# Altium PCB PCB2.PcbDoc
Units mil, origin at the board's own origin, x right, y up, seen from the top; angles counter-clockwise.
Board outline 6000 x 4000 mil, 2 copper layers (Top Layer, Bottom Layer); 4 components, 85 nets, 140 pads, 0 vias.
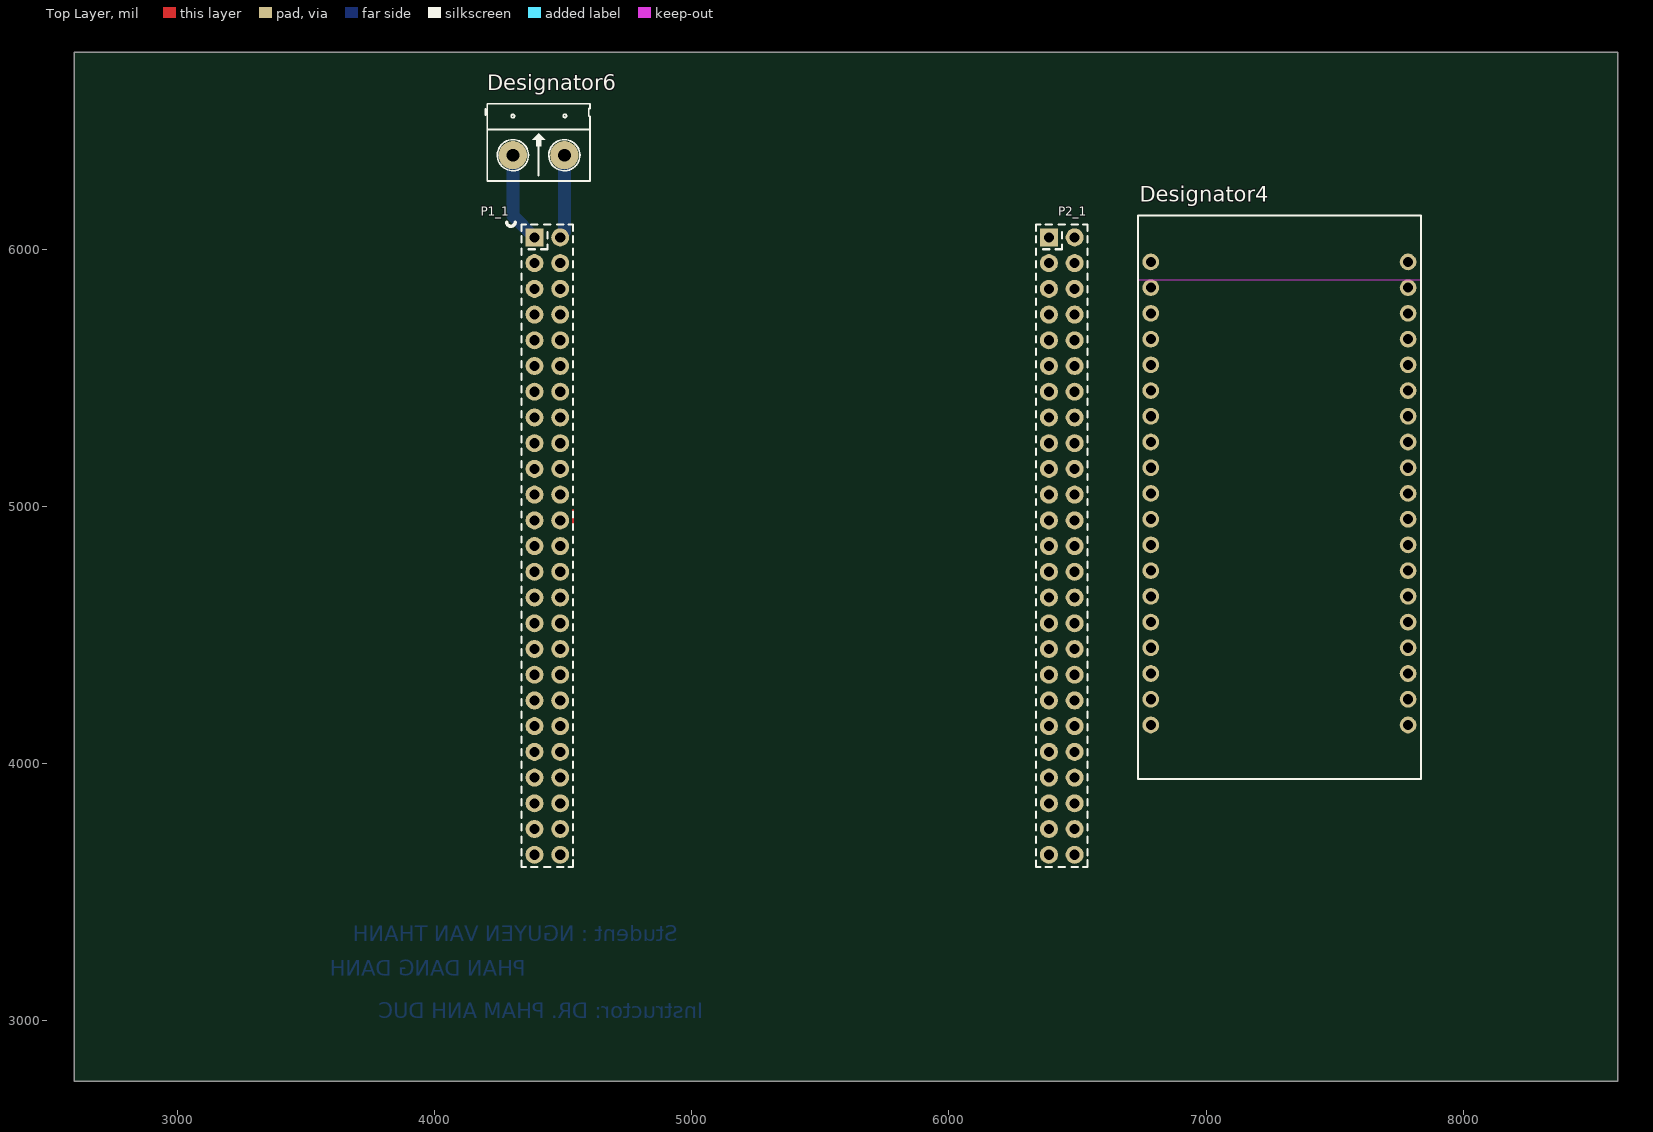
[diagram p0: Top Layer view]
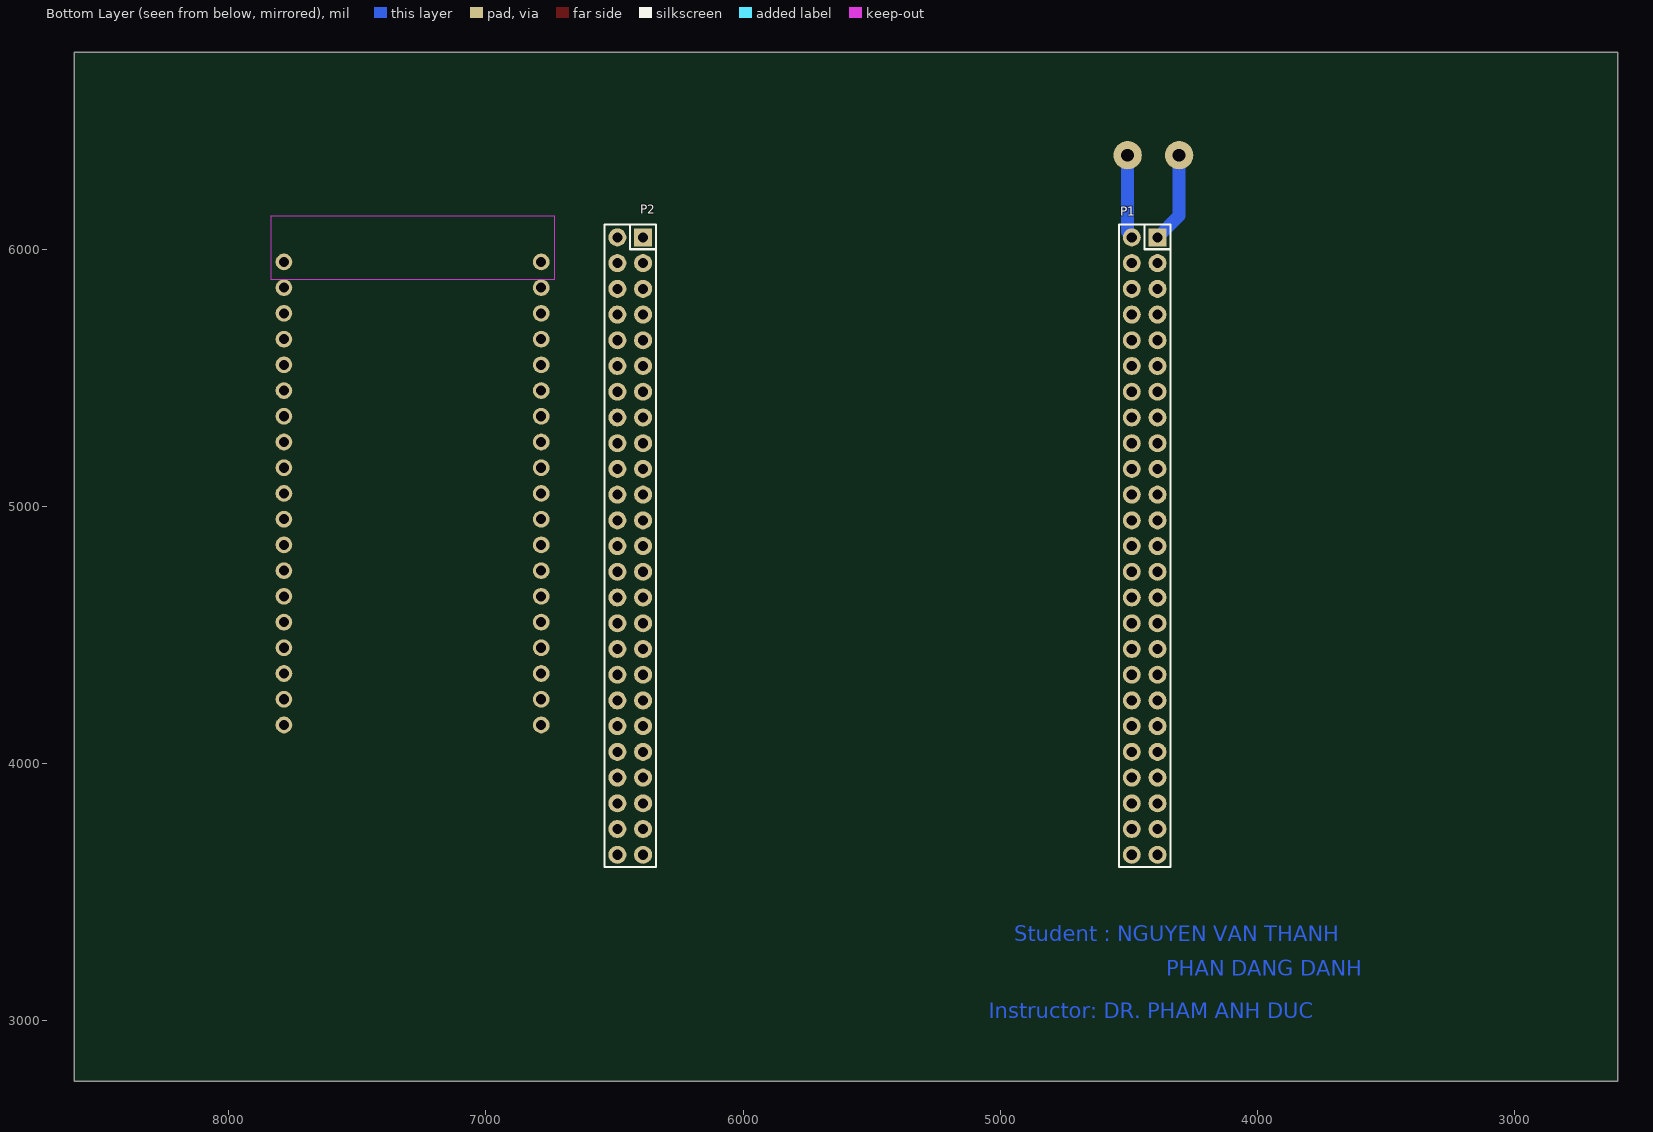
[diagram p1: Bottom Layer view, seen from below]

## Layer stack, top to bottom
Top Solder: solder mask 0.4, Solder Resist, Dk 3.5
Top Layer: signal copper 1.4
Dielectric 1: dielectric 12.6, FR-4, Dk 4.8
Bottom Layer: signal copper 1.4
Bottom Solder: solder mask 0.4, Solder Resist, Dk 3.5

## Board outline
2600,2765 8600,2765 8600,6765 2600,6765

## Design rules (kind name [scope] priority, off if disabled: settings)
Clearance [All] p1: gap=10 ignorepadtopadclearanceinfootprint=FALSE except(0: Arc-Hole Track-Hole SMDPad-Hole THPad-Hole Via-Hole Fill-Hole Poly-Hole Region-Hole Text-Hole)
PolygonConnect [All] p1: connectstyle=Relief reliefconductorwidth=10 reliefentries=4 polygonreliefangle="90 Angle" airgapwidth=10
RoomDefinition Sheet1 [InComponentClass('Sheet1')] p1: confinementstyle=ConfineIn formatcopy=TRUE lockcomponents=FALSE outline 1600,1765 3600,1765 3600,2765 1600,2765
RoutingVias [All] p1: holewidth=28 width=50 viastyle="Through Hole" minholewidth=28 minwidth=50 maxholewidth=28 maxwidth=50
SolderMaskExpansion [All] p1: expansion=4 istentingtop=FALSE
Width [All] p1: maxlimit=50 minlimit=10 preferedwidth=50 toplayer_maxwidth=10 toplayer_prefwidth=10 bottomlayer_minwidth=50 minimp=50.000000 maximp=50.000000 favimp=50.000000
30 further rules are at their usual default settings.

## Classes and differential pairs
component class Sheet1: P?

## Components (designator, comment, footprint, x,y, rotation, side; value= is the part's Value field where it differs from the comment)
Designator4 "Comment" "ESP32 NodeMCU" 7285,3940 r0 top
Designator6 "Comment" HED2 4305,6365 r0 top
P1_1 "Header 25X2" "HDR2X25 (PRIMARY)" 4438.93,4845.4 r270 top (schematic designator P1)
P2_1 "Header 25X2" "HDR2X25 (PRIMARY)" 6438.93,4845.4 r270 top (schematic designator P2)

## Footprints (in the part's own frame and the unit in brackets; to place one, negate y for a bottom-side part, rotate by r counter-clockwise, add the part's x,y. Pads: shape width x height; smd on the part's side, far side on the other; paste and mask are expansions set on the pad)
"ESP32 NodeMCU" [mm] "ESP32 NodeMCU LuaNode32 Module Thu Phát Wifi 38 Chân"
  round 1.65 hole 1: 1(-12.7,51.054) 2(-12.7,48.514) 3(-12.7,45.974) 4(-12.7,43.434) 5(-12.7,40.894) 6(-12.7,38.354) 7(-12.7,35.814) 8(-12.7,33.274) 9(-12.7,30.734) 10(-12.7,28.194) 11(-12.7,25.654) 12(-12.7,23.114) 13(-12.7,20.574) 14(-12.7,18.034) 15(-12.7,15.494) 16(-12.7,12.954) 17(-12.7,10.414) 18(-12.7,7.874) 19(-12.7,5.334) 20(12.7,5.334) 21(12.7,7.874) 22(12.7,10.414) 23(12.7,12.954) 24(12.7,15.494) 25(12.7,18.034) 26(12.7,20.574) 27(12.7,23.114) 28(12.7,25.654) 29(12.7,28.194) 30(12.7,30.734) 31(12.7,33.274) 32(12.7,35.814) 33(12.7,38.354) 34(12.7,40.894) 35(12.7,43.434) 36(12.7,45.974) 37(12.7,48.514) 38(12.7,51.054)
  Keep-Out Layer pour cut-out: -13.97,49.284 13.97,49.284 13.97,55.626 -13.97,55.626
  silkscreen extent -13.97,0 13.97,55.63, body extent -13.97,0 13.97,55.58, height 10.6
"HDR2X25 (PRIMARY)" [mil]
  rect 70x70 / inner round 60 / far side rect 70x70 hole 39.37 paste+0 mask+1.97: 1(-1200,-50)
  round 70 / inner round 60 / far side round 70 hole 39.37 paste+0 mask+1.97: 2(-1200,50) 3(-1100,-50) 4(-1100,50) 5(-1000,-50) 6(-1000,50) 7(-900,-50) 8(-900,50) 9(-800,-50) 10(-800,50) 11(-700,-50) 12(-700,50) 13(-600,-50) 14(-600,50) 15(-500,-50) 16(-500,50) 17(-400,-50) 18(-400,50) 19(-300,-50) 20(-300,50) 21(-200,-50) 22(-200,50) 23(-100,-50) 24(-100,50) 25(0,-50) 26(0,50) 27(100,-50) 28(100,50) 29(200,-50) 30(200,50) 31(300,-50) 32(300,50) 33(400,-50) 34(400,50) 35(500,-50) 36(500,50) 37(600,-50) 38(600,50) 39(700,-50) 40(700,50) 41(800,-50) 42(800,50) 43(900,-50) 44(900,50) 45(1000,-50) 46(1000,50) 47(1100,-50) 48(1100,50) 49(1200,-50) 50(1200,50)
  silkscreen extent -1250,-100 1248,100
HED2 [mil] "Header 2, 2 pin, hight 300mil, Pin to Pin 200, Colour Green"
  round 110 hole 50: 1(0,0) 2(200,0)
  silkscreen extent -106,-100 300,200, body extent -92,-140 302,155, height 394

## Part data
P1_1 P2_1: "Header, 25-Pin, Dual row", LatestRevisionDate=17-Jul-2002, LatestRevisionNote="Re-released for DXP Platform.", Publisher="Altium Limited"

## Nets (pads, with @x,y where several pads share a name; then routed paths per layer and width w, separated by ;. In a path a pad name is that pad's centre, name@x,y a point inside that pad or via, vN(x,y) a via of type N, cw(c..) or ccw(c..) an arc to the next point about the centre after c; other vN are vias at no path point)
3V: 
5V: 
BOOT0: 
GND: 
NRST: 
PA0: 
PA1: 
PA2: 
PA3: 
PA4: 
PA5: 
PA6: 
PA7: 
PA8: 
PA9: 
PA10: 
PA13: 
PA14: 
PA15: 
PB0: 
PB1: 
PB2: 
PB3: 
PB4: 
PB5: 
PB6: 
PB7: 
PB8: 
PB9: 
PB10: 
PB12: 
PB13: 
PB14: 
PB15: 
PC0: 
PC1: 
PC2: 
PC3: 
PC4: 
PC5: 
PC6: 
PC7: 
PC8: 
PC9: 
PC10: 
PC11: 
PC12: 
PC13: 
PC14: 
PC15: 
PD0: 
PD1: 
PD2: 
PD3: 
PD4: 
PD5: 
PD6: 
PD7: 
PD8: 
PD9: 
PD10: 
PD11: 
PD12: 
PD13: 
PD14: 
PD15: 
PE0: 
PE1: 
PE2: 
PE3: 
PE4: 
PE5: 
PE6: 
PE7: 
PE8: 
PE9: 
PE10: 
PE11: 
PE12: 
PE13: 
PE14: 
PE15: 
PH0: 
PH1: 
VDD: 
pads on no net: Designator4.1 Designator4.2 Designator4.3 Designator4.4 Designator4.5 Designator4.6 Designator4.7 Designator4.8 Designator4.9 Designator4.10 Designator4.11 Designator4.12 Designator4.13 Designator4.14 Designator4.15 Designator4.16 Designator4.17 Designator4.18 Designator4.19 Designator4.20 Designator4.21 Designator4.22 Designator4.23 Designator4.24 Designator4.25 Designator4.26 Designator4.27 Designator4.28 Designator4.29 Designator4.30 Designator4.31 Designator4.32 Designator4.33 Designator4.34 Designator4.35 Designator4.36 Designator4.37 Designator4.38 Designator6.1 Designator6.2 P1_1.1 P1_1.2 P1_1.3 P1_1.4 P1_1.5 P1_1.6 P1_1.7 P1_1.8 P1_1.9 P1_1.10 P1_1.11 P1_1.12 P1_1.13 P1_1.14 P1_1.15 P1_1.16 P1_1.17 P1_1.18 P1_1.19 P1_1.20 P1_1.21 P1_1.22 P1_1.23 P1_1.24 P1_1.25 P1_1.26 P1_1.27 P1_1.28 P1_1.29 P1_1.30 P1_1.31 P1_1.32 P1_1.33 P1_1.34 P1_1.35 P1_1.36 P1_1.37 P1_1.38 P1_1.39 P1_1.40 P1_1.41 P1_1.42 P1_1.43 P1_1.44 P1_1.45 P1_1.46 P1_1.47 P1_1.48 P1_1.49 P1_1.50 P2_1.1 P2_1.2 P2_1.3 P2_1.4 P2_1.5 P2_1.6 P2_1.7 P2_1.8 P2_1.9 P2_1.10 P2_1.11 P2_1.12 P2_1.13 P2_1.14 P2_1.15 P2_1.16 P2_1.17 P2_1.18 P2_1.19 P2_1.20 P2_1.21 P2_1.22 P2_1.23 P2_1.24 P2_1.25 P2_1.26 P2_1.27 P2_1.28 P2_1.29 P2_1.30 P2_1.31 P2_1.32 P2_1.33 P2_1.34 P2_1.35 P2_1.36 P2_1.37 P2_1.38 P2_1.39 P2_1.40 P2_1.41 P2_1.42 P2_1.43 P2_1.44 P2_1.45 P2_1.46 P2_1.47 P2_1.48 P2_1.49 P2_1.50
copper on no net: | length 1091.3
  Top Layer w6.5: 4488.93,4445.4 4522.44,4445.4 ; 4488.93,4645.4 4490.44,4645.4 4502.43,4657.4 4502.43,4669.4 ; 4488.93,4945.4 4488.93,4954.28 ; 4488.93,5045.4 4489.43,5045.4 ; 4488.93,5245.4 4518.14,5245.4 ; 4538.71,4909.4 4538.72,4977.05 4538.72,4986.53 ; 6381.94,4645.4 6388.93,4645.4
  Bottom Layer w6.5: 4463.44,5445.4 4488.93,5445.4 ; 4488.93,3845.4 4504.43,3845.4 ; 4488.93,5645.4 4510.94,5645.4 ; 6355.43,3845.4 6388.93,3845.4 ; 6355.93,4448.4 6385.94,4448.4 6388.93,4445.4 ; 6369.93,4545.4 6388.93,4545.4 ; 6375.43,5045.4 6388.93,5045.4 ; 6375.43,5145.4 6388.93,5145.4 ; 6378.93,4245.4 6388.93,4245.4 ; 6384.93,5345.4 6388.93,5345.4 ; 6388.93,4745.4 6388.93,4754.4 ; 6388.93,5445.4 6388.93,5454.4 ; 6486.01,5245.4 6488.93,5245.4 ; 6488.93,5145.4 6488.93,5148.04
  Bottom Layer w9.84: 4388.93,5845.4 4398.58,5845.4
  Bottom Layer w50: 4305,6365 4305,6129.34 4388.93,6045.4 ; 4488.93,6045.4 4488.93,6050.81 4505,6066.88 4505,6365

## Other copper
Bottom Layer:
  text "Student : NGUYEN VAN THANH" at 4945,3310 h60
  text "PHAN DANG DANH" at 4355,3175 h60
  text "Instructor: DR. PHAM ANH DUC" at 5045,3010 h60

## Silkscreen, mask and mechanical layers (free items; w line width, h text height)
Top Overlay:
  lines w12: 4279.59,6105.24 ccw(c4297.2,6105.24) 4314.81,6105.24 ; 4281.45,6105.24 ccw(c4297.2,6105.24) 4312.95,6105.24

## Text inside footprints (layer, text, board x,y; h text height)
P1_1: Bottom Overlay "P1" at 4533.03,6117.45 h59.06
P2_1: Bottom Overlay "P2" at 6399.17,6125.72 h59.06